# Altium PCB Receiver.PcbDoc
Units mm, origin at the board's own origin, x right, y up, seen from the top; angles counter-clockwise.
Board outline 55 x 38 mm, 4 copper layers (Component Side, Signal Layer 1, Signal Layer 2, Solder Side), stack 1.57 mm thick; 48 components, 36 nets, 141 pads, 184 vias.
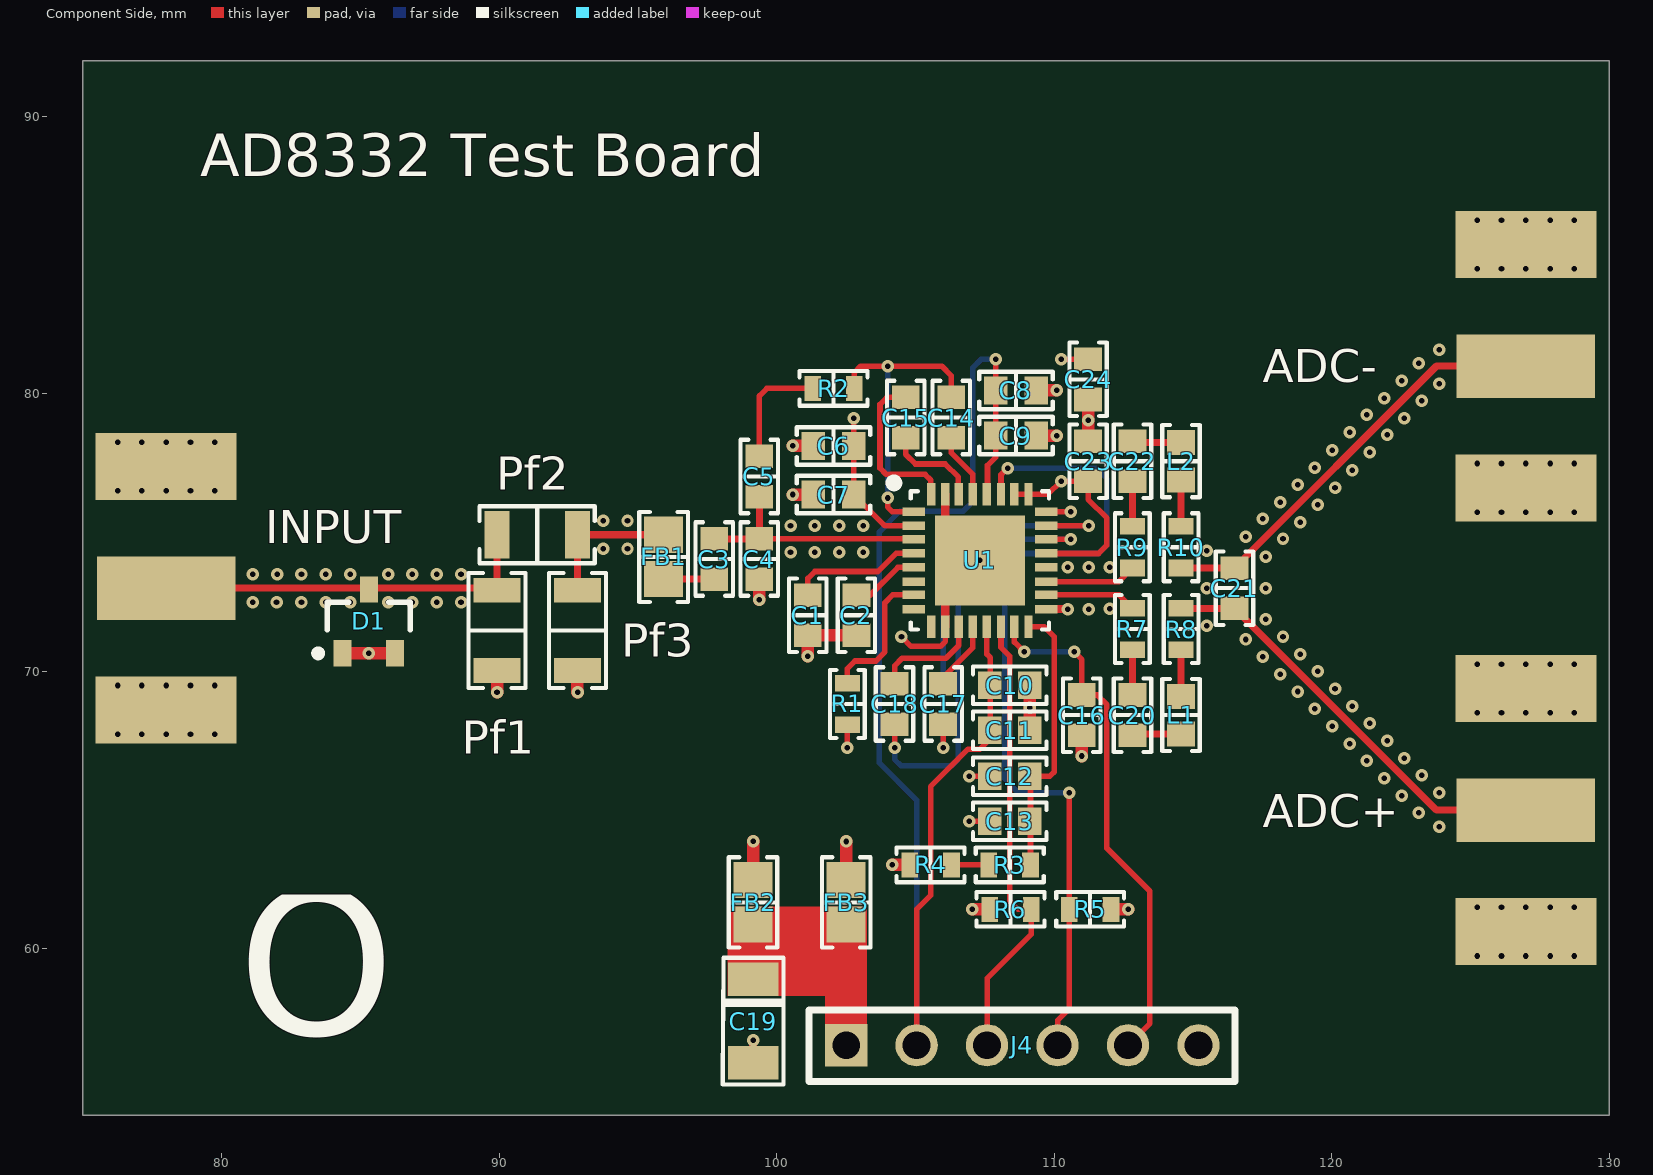
[diagram p0: Component Side view]
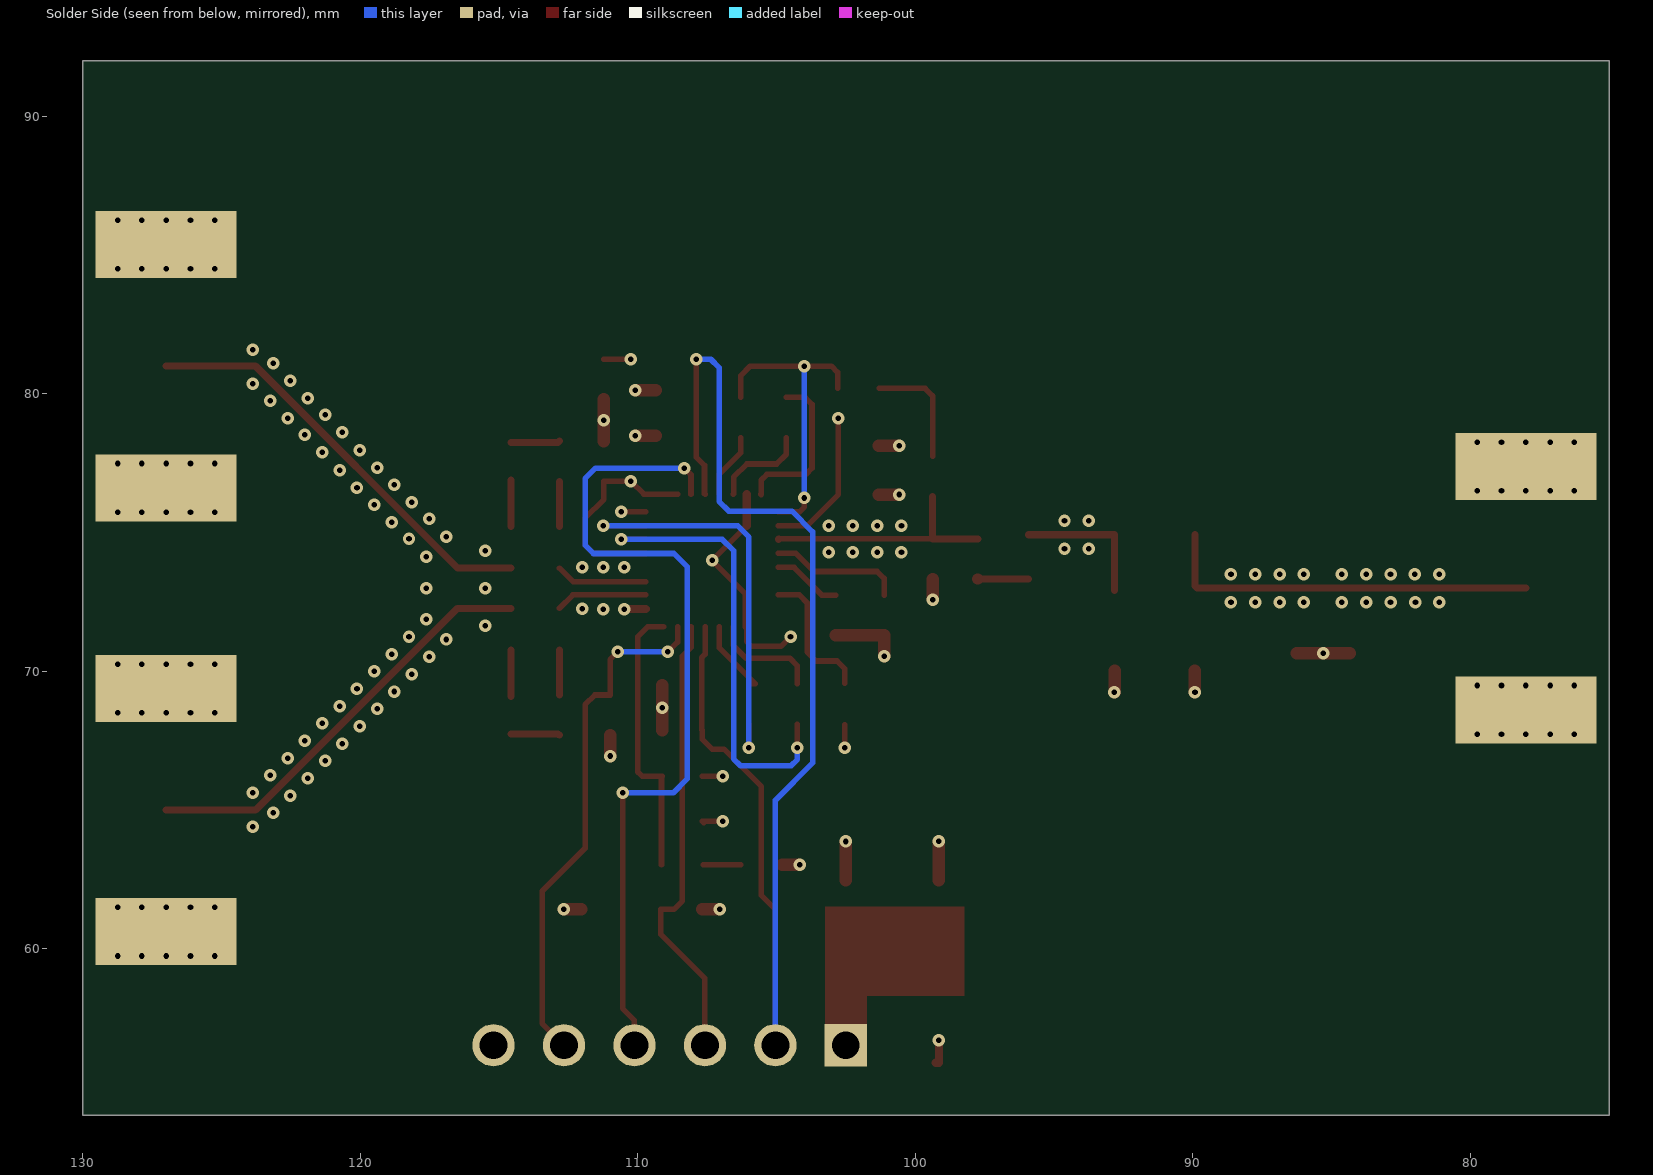
[diagram p1: Solder Side view, seen from below]
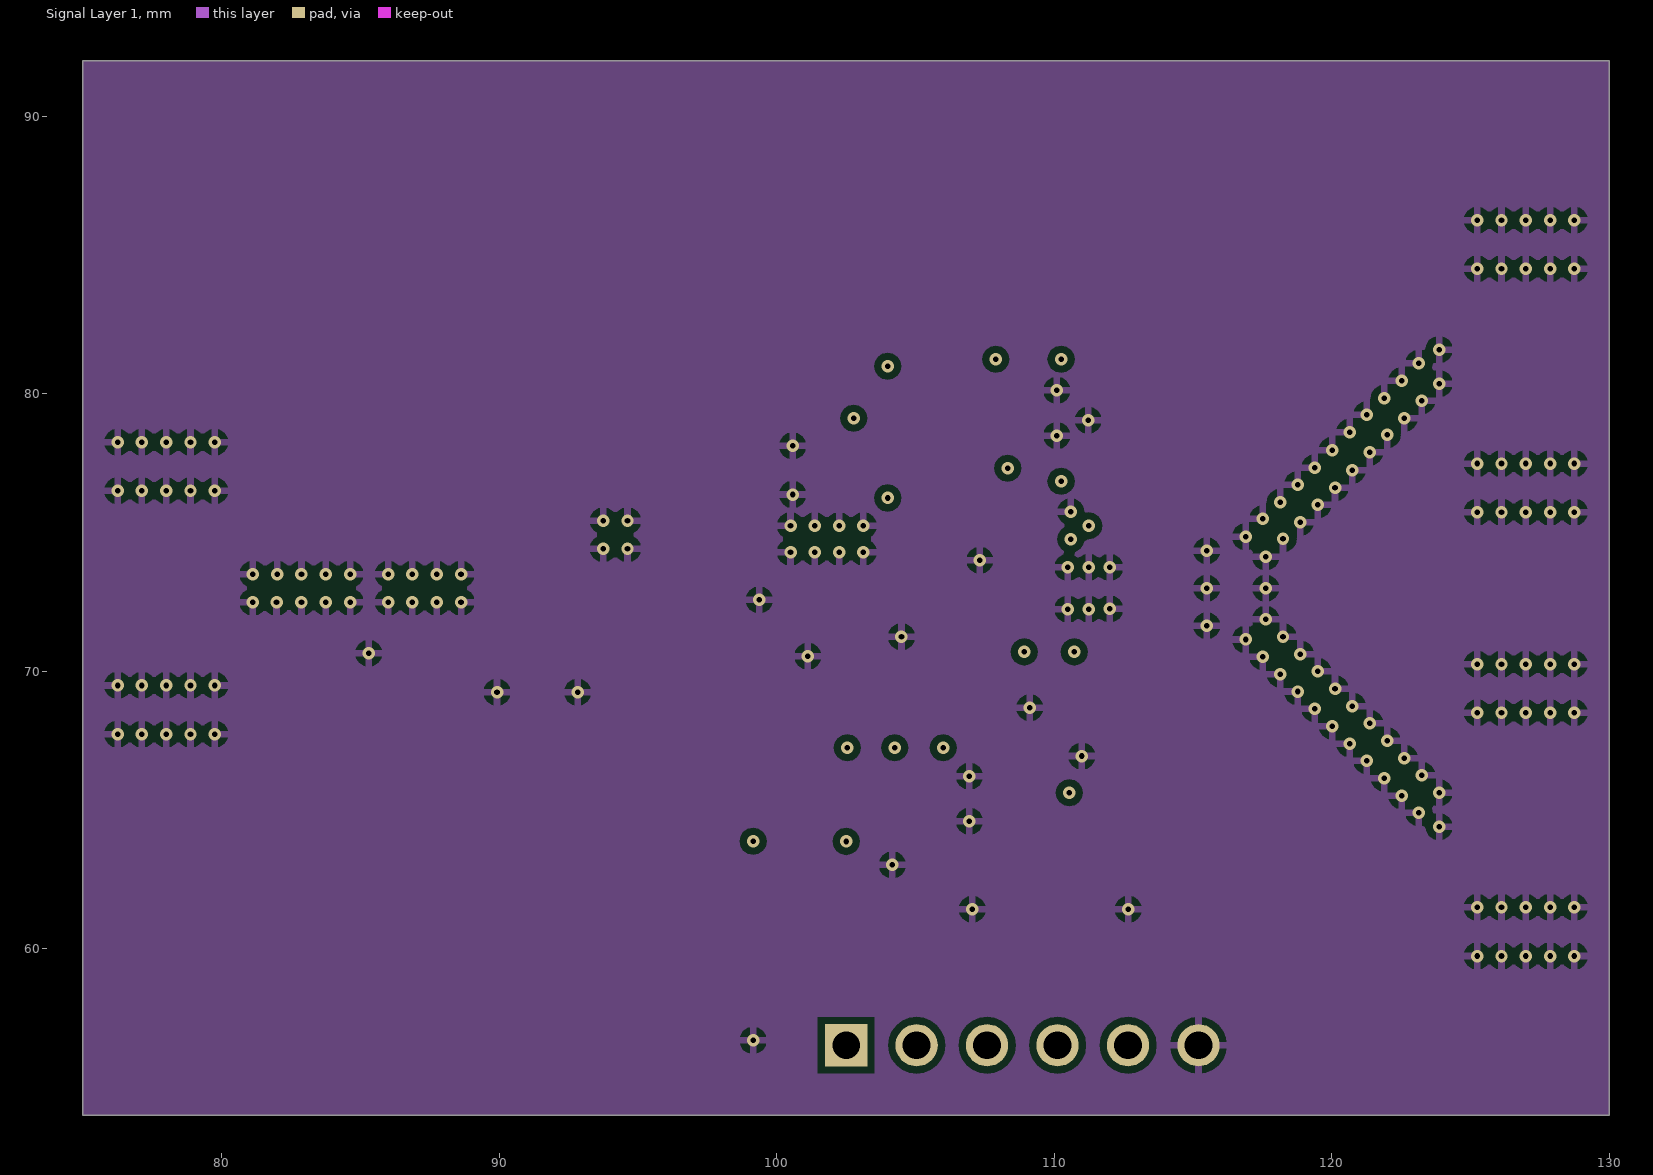
[diagram p2: Signal Layer 1]
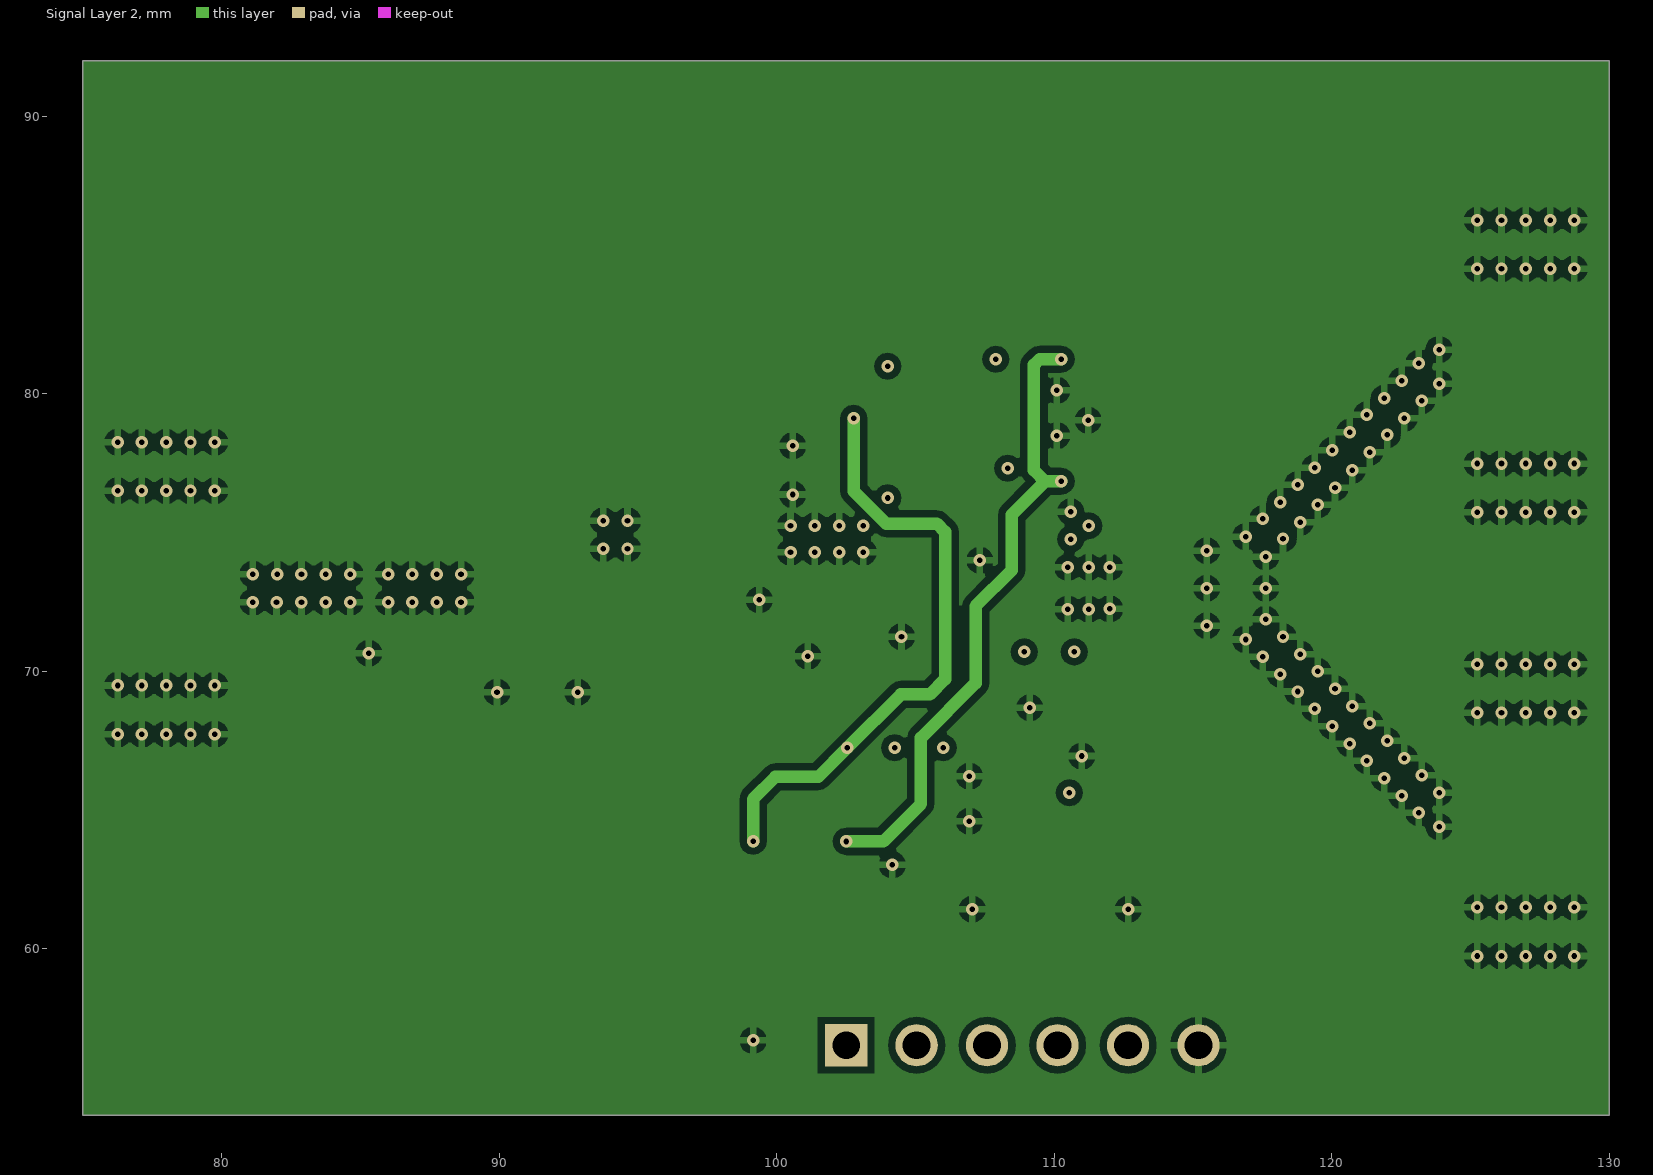
[diagram p3: Signal Layer 2]
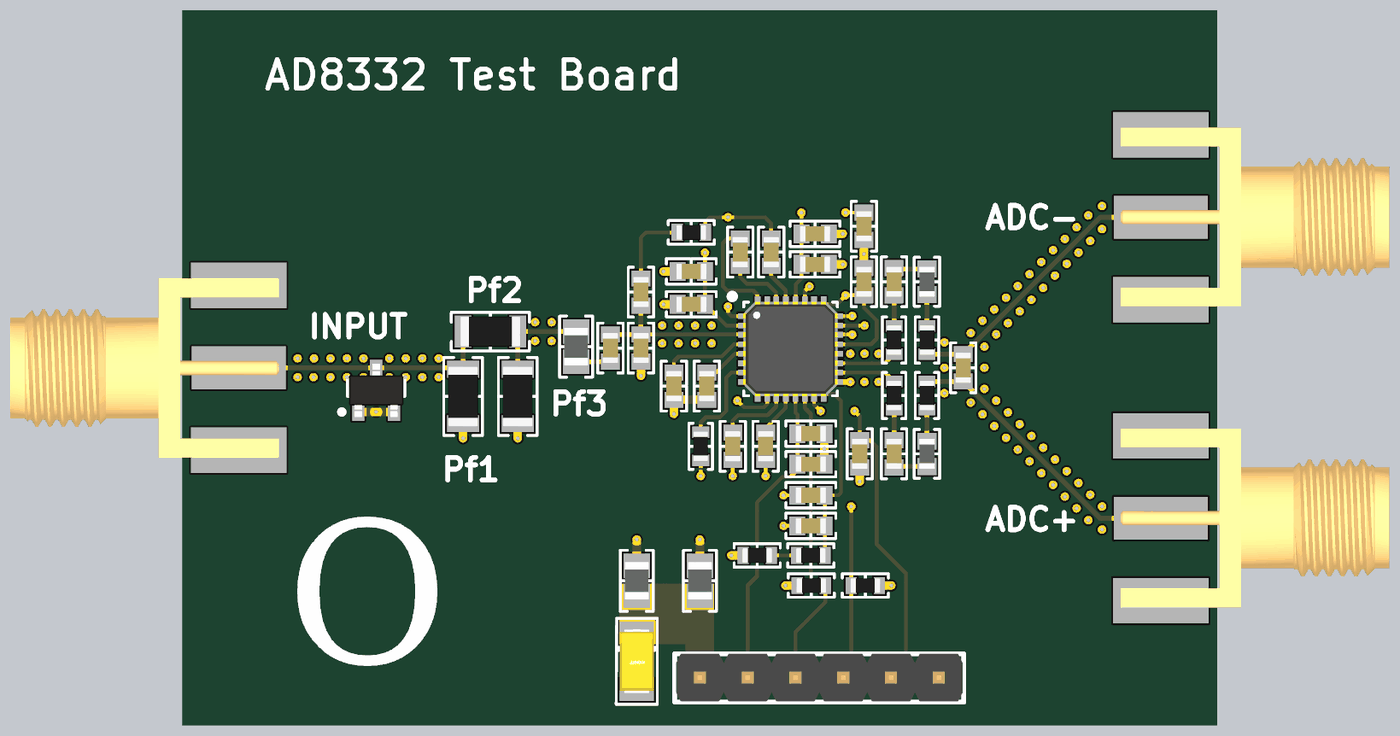
[diagram p4: 3D render of the assembled board from above, using the file's embedded part models]

## Layer stack, top to bottom
Top Solder: solder mask 0.015, Solder Resist, Dk 3.8
Component Side: signal copper 0.035
Dielectric 1: prepreg 0.2, 7628, Dk 4.6
Signal Layer 1: signal copper 0.0175
Dielectric 2: core 1.065, FR-4, Dk 4.5
Signal Layer 2: signal copper 0.0175
Dielectric 5: prepreg 0.2, 7628, Dk 4.6
Solder Side: signal copper 0.035
Bottom Solder: solder mask 0.015, Solder Resist, Dk 3.8

## Board outline
75,54 130,54 130,92 75,92

## Design rules (kind name [scope] priority, off if disabled: settings)
Clearance [All] p1 off: gap=0.254 ignorepadtopadclearanceinfootprint=FALSE except(0: Arc-Hole Track-Hole SMDPad-Hole THPad-Hole Via-Hole Fill-Hole Poly-Hole Region-Hole Text-Hole)
PolygonConnect [All] p1: connectstyle=Relief reliefconductorwidth=0.254 reliefentries=4 polygonreliefangle="90 Angle" airgapwidth=0.254
RoutingVias [All] p1: holewidth=0.711 width=1.27 viastyle="Through Hole" minholewidth=0.2 minwidth=0.45 maxholewidth=0.711 maxwidth=1.27
SolderMaskExpansion [All] p1: expansion=0.102
Width [All] p1: maxlimit=0.5 minlimit=0.2 preferedwidth=0.254
30 further rules are at their usual default settings.

## Components (designator, comment, footprint, x,y, rotation, side; value= is the part's Value field where it differs from the comment)
ADC+ "73251-1150" 73251-1150 130,65 r0 top (schematic designator J2)
ADC- "73251-1150" 73251-1150 130,81 r0 top (schematic designator J3)
C1 "100nF" "CAP 0603/1608" 101.125,72.025 r90 top
C2 "100nF" "CAP 0603/1608" 102.875,72.025 r90 top
C3 "100nF" "CAP 0603/1608" 97.75,74.05 r90 top
C4 "22pF" "CAP 0603/1608" 99.375,74.05 r90 top
C5 "18nF" "CAP 0603/1608" 99.375,77.025 r270 top
C6 "100nF" "CAP 0603/1608" 102.05,78.125 r180 top
C7 "1nF" "CAP 0603/1608" 102.05,76.375 r0 top
C8 "100nF" "CAP 0603/1608" 108.625,80.125 r0 top
C9 "1nF" "CAP 0603/1608" 108.625,78.5 r180 top
C10 "1nF" "CAP 0603/1608" 108.4,69.5 r180 top
C11 "100nF" "CAP 0603/1608" 108.4,67.875 r0 top
C12 "1nF" "CAP 0603/1608" 108.4,66.225 r0 top
C13 "100nF" "CAP 0603/1608" 108.4,64.6 r0 top
C14 "100nF" "CAP 0603/1608" 106.296,79.15 r90 top
C15 "100nF" "CAP 0603/1608" 104.65,79.15 r90 top
C16 "1nF" "CAP 0603/1608" 111,68.425 r90 top
C17 "100nF" "CAP 0603/1608" 106,68.825 r270 top
C18 "100nF" "CAP 0603/1608" 104.25,68.825 r270 top
C19 "1uF" "CAP CASE A" 99.15,57.395 r270 top
C20 "100nF" "CAP 0603/1608" 112.825,68.425 r270 top
C21 "18pF" "CAP 0603/1608" 116.5,73 r270 top
C22 "100nF" "CAP 0603/1608" 112.825,77.575 r90 top
C23 "1nF" "CAP 0603/1608" 111.225,77.575 r270 top
C24 "100nF" "CAP 0603/1608" 111.225,80.525 r90 top
D1 "BAS40-04" SOT-23-3 85.3,71.8 r90 top
FB1 "120R" "FER 0805/2012" 95.925,74.125 r270 top
FB2 "120R" "FER 0805/2012" 99.15,61.675 r90 top
FB3 "120R" "FER 0805/2012" 102.505,61.675 r90 top
INPUT "73251-1150" 73251-1150 75,73 r180 top (schematic designator J1)
J4 "2211S-06G" "HEADER 6-WAY 2.54 mm" 102.505,56.525 r0 top
L1 "1.5uH" "FER 0603/1608" 114.575,68.425 r90 top
L2 "1.5uH" "FER 0603/1608" 114.575,77.575 r270 top
Pf1 "0R" "RES 1206/3216" 89.922,71.475 r90 top
Pf2 "0R" "RES 1206/3216" 91.372,74.925 r0 top
Pf3 "0R" "RES 1206/3216" 92.822,71.475 r90 top
R1 "0R" "RES 0603/1608" 102.55,68.825 r270 top
R2 "280R" "RES 0603/1608" 102.05,80.2 r180 top
R3 "10K" "RES 0603/1608" 108.4,63.025 r180 top
R4 "1K" "RES 0603/1608" 105.55,63.025 r0 top
R5 "10K" "RES 0603/1608" 111.3,61.425 r180 top
R6 "10K" "RES 0603/1608" 108.425,61.425 r0 top
R7 "84.5R" "RES 0603/1608" 112.825,71.525 r270 top
R8 "158R" "RES 0603/1608" 114.575,71.525 r90 top
R9 "84.5R" "RES 0603/1608" 112.825,74.475 r90 top
R10 "158R" "RES 0603/1608" 114.575,74.475 r270 top
U1 "AD8332ACPZ-R7" LFCSP-32 107.325,74 r0 top

## Footprints (in the part's own frame and the unit in brackets; to place one, negate y for a bottom-side part, rotate by r counter-clockwise, add the part's x,y. Pads: shape width x height; smd on the part's side, far side on the other; paste and mask are expansions set on the pad)
73251-1150 [mm]
  rect 5x2.29 smd: 1(-3,0)
  rect 5.08x2.415 smd: 2(-3,-4.383) 2(-3,4.383)
  rect 5.08x2.415 smd far side: 2(-3,-4.383) 2(-3,4.383)
  body extent -5.14,-4.75 9.14,4.78, height 4.36
"CAP 0603/1608" [mm] "Chip Capacitor, 2-Leads, Body 1.60x0.80mm, IPC Medium Density"
  rect 0.85x1 smd: 1(-0.725,0) 2(0.725,0)
  silkscreen extent -1.33,-0.67 1.33,0.67, body extent -0.8,-0.41 0.8,0.41, height 0.82
"CAP CASE A" [mm] "Tantalum Capacitor CASE A (3216)"
  rect 1.2x1.82 smd: 1(-1.505,0) 2(1.505,0)
  silkscreen extent -2.29,-1.09 2.29,1.09, body extent -1.7,-0.9 1.7,0.9, height 1.81
"FER 0603/1608" [mm] "Chip Ferrite, 2-Leads, Body 1.60x0.80mm, IPC Medium Density"
  rect 0.9x1 smd: 1(-0.675,0) 2(0.675,0)
  silkscreen extent -1.3,-0.67 1.3,0.67, body extent -0.8,-0.41 0.8,0.41, height 0.82
"FER 0805/2012" [mm] "Chip Ferrite, 2-Leads, Body 2.00x1.20mm, IPC Medium Density"
  rect 1.3x1.4 smd: 1(-0.8,0) 2(0.8,0)
  silkscreen extent -1.63,-0.87 1.63,0.87, body extent -1,-0.64 1,0.64, height 1.26
"HEADER 6-WAY 2.54 mm" [mil]
  rect 60x60 hole 39.37: 1(0,0)
  round 60 hole 39.37: 2(100,0) 3(200,0) 4(300,0) 5(400,0) 6(500,0)
  silkscreen extent -53,-51 552,50, body extent -50,-110 550,50, height 337
LFCSP-32 [mil] "5x5mm"
  rect 32x12 smd: 1(-94,69) 2(-94,49) 3(-94,30) 4(-94,10) 5(-94,-10) 6(-94,-30) 7(-94,-49) 8(-94,-69) 17(94,-69) 18(94,-49) 19(94,-30) 20(94,-10) 21(94,10) 22(94,30) 23(94,49) 24(94,69)
  rect 12x32 smd: 9(-69,-94) 10(-49,-94) 11(-30,-94) 12(-10,-94) 13(10,-94) 14(30,-94) 15(49,-94) 16(69,-94) 25(69,94) 26(49,94) 27(30,94) 28(10,94) 29(-10,94) 30(-30,94) 31(-49,94) 32(-69,94)
  rect 128x128 smd: 33(0,0)
  silkscreen extent -126,-98 98,114, body extent -99,-99 99,99, height 35
"RES 0603/1608" [mm] "Chip Resistor, 2-Leads, Body 1,60x0,80mm, IPC Medium Density"
  rect 0.6x0.9 smd: 1(-0.75,0) 2(0.75,0)
  silkscreen extent -1.22,-0.63 1.22,0.63, body extent -0.8,-0.4 0.8,0.4, height 0.5
"RES 1206/3216" [mm] "Chip Resistor, 2-Leads, Body 3,20x1,60mm, IPC Medium Density"
  rect 0.9x1.7 smd: 1(-1.45,0) 2(1.45,0)
  silkscreen extent -2.07,-1.02 2.07,1.02, body extent -1.6,-0.8 1.6,0.8, height 0.6
SOT-23-3 [mm] "SOT23, 3-Leads, Body 2.90x2.40mm, Pitch 0.95mm, IPC Medium Density"
  rect 0.95x0.65 smd: 1(-1.15,0.95) 2(-1.15,-0.95) 3(1.15,0)
  silkscreen extent -1.27,-1.5 0.7,1.95, body extent -1.41,-1.45 1.41,1.45, height 1.5

## Part data
ADC+ ADC- INPUT: "CONN SMA RCPT STR 50OHM EDGE MNT", Case/Package=SMA, Dielectric Material=PTFE, Housing Color=Gold, Manufacturer=Molex, Max Frequency=18GHz, Max Operating Temperature=165°C, Min Operating Temperature=-65°C, Package Quantity=1600, Voltage Rating=500V, Body Material=Brass, Body Plating=Gold, ComponentLink1Description=http://www.farnell.com/datasheets/1596721.pdf?src-supplier=Farnell, ComponentLink1URL=http://www.farnell.com/datasheets/1596721.pdf?src-supplier=Farnell, ComponentLink2Description=http://www.molex.com/webdocs/datasheets/pdf/en-us/0732511150_RF_COAX_CONNECTORS.pdf?src-supplier=Avnet, ComponentLink2URL=http://www.molex.com/webdocs/datasheets/pdf/en-us/0732511150_RF_COAX_CONNECTORS.pdf?src-supplier=Avnet, ComponentLink3Description=https://www.molex.com/pdm_docs/ps/PS-89675-346.pdf?src-supplier=Digi-Key, ComponentLink3URL=https://www.molex.com/pdm_docs/ps/PS-89675-346.pdf?src-supplier=Digi-Key, ComponentLink4Description=http://www.onlinecomponents.com/productFiles/mf-MOL/473370732511150_rf_coax_nectors.pdf?src-supplier=Onlinecomponents.com, ComponentLink4URL=http://www.onlinecomponents.com/productFiles/mf-MOL/473370732511150_rf_coax_nectors.pdf?src-supplier=Onlinecomponents.com, ComponentLink5Description=http://www.farnell.com/datasheets/1596721.pdf?src-supplier=Element14, ComponentLink5URL=http://www.farnell.com/datasheets/1596721.pdf?src-supplier=Element14, ComponentLink6Description=http://uk.rs-online.com/webdocs/13c4/0900766b813c49cf.pdf?src-supplier=RSComponents, ComponentLink6URL=http://uk.rs-online.com/webdocs/13c4/0900766b813c49cf.pdf?src-supplier=RSComponents, Connector Type=SMA,Socket, Contact Material=Copper, Contact Plating=Gold, Depth=9.53mm, Fastening Type=Threaded, Impedance=50R, Insulation Material=Polytetrafluoroethylene, Lead Free="Lead Free", Length=9.53mm, Manufacturer Part Number=73251-1150, Mount=Edge, Packaging=Tray, Radiation Hardening=No, Stock 1=0, Supplier 1=Farnell, Termination=Solder
C1 C2 C3 C6 C8 C11 C13 C14 C15 C17 C18 C20 C22 C24: library part GCJ188R71H104KA12D, "CAPACITOR 0603 100nF 10% 50V", Case/Package=0603, Case Code (Metric)=1608, Dielectric=X7R, Manufacturer=Murata, Max Operating Temperature=125°C, Min Operating Temperature=-55°C, Package Quantity=1, Ratings=AEC-Q200, Tolerance=10%, Voltage Rating=50V, Capacitance=100nF, Case Code (Imperial)=0603, ComponentLink1Description=http://search.murata.co.jp/Ceramy/image/img/A01X/partnumbering_e_02.pdf?src-supplier=Digi-Key, ComponentLink1URL=http://search.murata.co.jp/Ceramy/image/img/A01X/partnumbering_e_02.pdf?src-supplier=Digi-Key, ComponentLink2Description=http://www.murata.com/products/catalog/pdf/c03e.pdf?src-supplier=Future+Electronics, ComponentLink2URL=http://www.murata.com/products/catalog/pdf/c03e.pdf?src-supplier=Future+Electronics, ComponentLink3Description=https://www.verical.com/server-webapp/html/getDatasheet?partID=369886&src-supplier=Verical, ComponentLink3URL=https://www.verical.com/server-webapp/html/getDatasheet?partID=369886&src-supplier=Verical, Depth=0.8mm, Features="Soft Termination", Height=0.8mm, Lead Free="Lead Free", Length=1.6mm, Manufacturer Part Number=GCJ188R71H104KA12D, Mount="Surface Mount", Packaging="Tape and Reel", Pricing 1="150=0.11, 500=0.066, 1000=0.055 (EUR)", Radiation Hardening=No, Stock 1=0, Supplier 1=Farnell, Termination=SMD/SMT, Thickness=0.035inch, Voltage Rating (DC)=50V, Width=0.031inch
C4: library part C1608C0G1H220J080AA, "CAPACITOR 0603 22 pF 50 V  5%, C0G / NP0", Case/Package=0603, Case Code (Metric)=1608, Dielectric=C0G, Dielectric Material=Ceramic, Manufacturer=TDK, Max Operating Temperature=125°C, Min Operating Temperature=-55°C, Package Quantity=1, Temperature Coefficient=30ppm/°C, Tolerance=5%, Voltage=50V, Capacitance=22pF, Case Code (Imperial)=0603, ComponentLink1Description=https://product.tdk.com/info/en/documents/chara_sheet/C1608C0G1H220J080AA.pdf?src-supplier=Digi-Key, ComponentLink1URL=https://product.tdk.com/info/en/documents/chara_sheet/C1608C0G1H220J080AA.pdf?src-supplier=Digi-Key, ComponentLink2Description=http://www.tdk.co.jp/tefe02/e412_c.pdf?src-supplier=Avnet+Europe, ComponentLink2URL=http://www.tdk.co.jp/tefe02/e412_c.pdf?src-supplier=Avnet+Europe, ComponentLink3Description=http://www.farnell.com/datasheets/1796654.pdf?src-supplier=Element14, ComponentLink3URL=http://www.farnell.com/datasheets/1796654.pdf?src-supplier=Element14, ComponentLink4Description=http://www.farnell.com/datasheets/1744655.pdf?src-supplier=Element14, ComponentLink4URL=http://www.farnell.com/datasheets/1744655.pdf?src-supplier=Element14, ComponentLink5Description=http://www.farnell.com/datasheets/1913358.pdf?src-supplier=Element14, ComponentLink5URL=http://www.farnell.com/datasheets/1913358.pdf?src-supplier=Element14, ComponentLink6Description=http://www.farnell.com/datasheets/2291921.pdf?src-supplier=Verical, ComponentLink6URL=http://www.farnell.com/datasheets/2291921.pdf?src-supplier=Verical, Depth=0.8mm, Height=0.8mm, Lead Free="Lead Free", Length=1.6mm, Manufacturer Part Number=C1608C0G1H220J080AA, Mount="Surface Mount", Number of Pins=2, Packaging="Tape and Reel", Radiation Hardening=No, REACH SVHC=Unknown, Stock 1=0, Supplier 1=Farnell, Termination=SMD/SMT, Thickness=0.037inch, Voltage Rating=50V, Voltage Rating (DC)=50V, Weight=7.1E-05oz, Width=0.031inch
C5: library part C1608C0G1V183J080AC, "CAPACITOR 0603 18nF 35V NP0", Case/Package=0603, Case Code (Metric)=1608, Dielectric Material=Ceramic, Manufacturer=TDK, Max Operating Temperature=125°C, Min Operating Temperature=-55°C, Tolerance=5%, Voltage Rating=35V, Capacitance=18nF, Case Code (Imperial)=0603, ComponentLink1Description=https://product.tdk.com/info/en/catalog/spec/mlccspec_commercial_general_midvoltage_en.pdf?src-supplier=Digi-Key, ComponentLink1URL=https://product.tdk.com/info/en/catalog/spec/mlccspec_commercial_general_midvoltage_en.pdf?src-supplier=Digi-Key, Lead Free="Lead Free", Length=0.063inch, Manufacturer Part Number=C1608C0G1V183J080AC, Mount="Surface Mount", Packaging="Tape and Reel", Pricing 1="150=0.127, 500=0.0919, 1000=0.0807, 2000=0.0669, 4000=0.0576, 20000=0.0502 (EUR)", Stock 1=0, Supplier 1=Farnell, Thickness=0.035inch, Voltage Rating (DC)=35V, Width=0.031inch
C7 C9 C10 C12 C16 C23: library part GRM1885C2A102JA01D, "CAPACITOR 0603 1nF 100V C0G/NP0", Case/Package=0603, Case Code (Metric)=1608, Dielectric=C0G, Manufacturer=Murata, Max Operating Temperature=125°C, Min Operating Temperature=-55°C, Package Quantity=1, Temperature Coefficient=30ppm/°C, Tolerance=5%, Voltage=100V, Capacitance=1nF, Case Code (Imperial)=0603, ComponentLink1Description=http://psearch.murata.com/capacitor/product/GRM1885C2A102JA01%23.pdf?src-supplier=Future+Electronics, ComponentLink1URL=http://psearch.murata.com/capacitor/product/GRM1885C2A102JA01%23.pdf?src-supplier=Future+Electronics, ComponentLink2Description=http://components.arrow.com/part/dataview/41890575S7256258N2606?src-supplier=Arrow+Electronics, ComponentLink2URL=http://components.arrow.com/part/dataview/41890575S7256258N2606?src-supplier=Arrow+Electronics, ComponentLink3Description=http://www.mouser.com/ds/2/281/c02e-2905.pdf?src-supplier=Mouser, ComponentLink3URL=http://www.mouser.com/ds/2/281/c02e-2905.pdf?src-supplier=Mouser, ComponentLink4Description=https://www.murata.com/~/media/webrenewal/support/library/catalog/products/capacitor/mlcc/c02e.ashx?la=en-us&src-supplier=Digi-Key, ComponentLink4URL=https://www.murata.com/~/media/webrenewal/support/library/catalog/products/capacitor/mlcc/c02e.ashx?la=en-us&src-supplier=Digi-Key, ComponentLink5Description=https://produktinfo.conrad.com/datenblaetter/450000-474999/451233-da-01-en-VS_KONDENSATOR_0603.pdf?src-supplier=Conrad, ComponentLink5URL=https://produktinfo.conrad.com/datenblaetter/450000-474999/451233-da-01-en-VS_KONDENSATOR_0603.pdf?src-supplier=Conrad, Depth=0.8mm, Height=0.8mm, Lead Free="Lead Free", Length=1.6mm, Manufacturer Part Number=GRM1885C2A102JA01D, Material=Ceramic, Mount="Surface Mount", Packaging="Tape and Reel", Pricing 1="4000=0.0144, 20000=0.0141 (EUR)", Radiation Hardening=No, REACH SVHC="No SVHC", Stock 1=0, Supplier 1=Farnell, Termination=SMD/SMT, Thickness=0.035inch, Voltage Rating=100V, Voltage Rating (DC)=100V, Width=0.031inch
C19: library part T491A105K016AT, "CAPACITOR TANT 1uF 16V", Case/Package=1206, Case Code (Metric)=3216, Dielectric Material=Tantalum, ESR (Equivalent Series Resistance)=10R, Leakage Current=500nA, Manufacturer=KEMET, Max Operating Temperature=125°C, Min Operating Temperature=-55°C, Package Quantity=1, Ripple Current=87mA, Tolerance=20%, Voltage=16V, Capacitance=1uF, Case Code (Imperial)=1206, ComponentLink1Description=https://4donline.ihs.com/images/VipMasterIC/IC/KEME/KEME-S-A0006487387/KEME-S-A0006487387-1.pdf?hkey=52A5661711E402568146F3353EA87419&src-supplier=Element14, ComponentLink1URL=https://4donline.ihs.com/images/VipMasterIC/IC/KEME/KEME-S-A0006487387/KEME-S-A0006487387-1.pdf?hkey=52A5661711E402568146F3353EA87419&src-supplier=Element14, ComponentLink2Description=http://www.rapidonline.com/pdf/458280_da_en_01.pdf?src-supplier=Rapid+Electronics, ComponentLink2URL=http://www.rapidonline.com/pdf/458280_da_en_01.pdf?src-supplier=Rapid+Electronics, ComponentLink3Description=http://www.jameco.com/Jameco/Products/ProdDS/1573169.pdf?src-supplier=Jameco, ComponentLink3URL=http://www.jameco.com/Jameco/Products/ProdDS/1573169.pdf?src-supplier=Jameco, ComponentLink4Description=http://www.kemet.com/kemet/web/homepage/kechome.nsf/file/T491%20Series/$file/KEM_T2005_T491.pdf?src-supplier=Farnell, ComponentLink4URL=http://www.kemet.com/kemet/web/homepage/kechome.nsf/file/T491%20Series/$file/KEM_T2005_T491.pdf?src-supplier=Farnell, ComponentLink5Description=http://www.mouser.com/ds/2/212/KEM_T2005_T491-1093550.pdf?src-supplier=Mouser, ComponentLink5URL=http://www.mouser.com/ds/2/212/KEM_T2005_T491-1093550.pdf?src-supplier=Mouser, ComponentLink6Description=https://www.distrelec.biz/Web/Downloads/_t/ds/KEM_T2005_T491_eng_tds.pdf?mime=application%2Fpdf&src-supplier=Distrelec, ComponentLink6URL=https://www.distrelec.biz/Web/Downloads/_t/ds/KEM_T2005_T491_eng_tds.pdf?mime=application%2Fpdf&src-supplier=Distrelec, ComponentLink7Description=https://api.kemet.com/component-edge/download/datasheet/T491A105K016AT.pdf?src-supplier=Digi-Key, ComponentLink7URL=https://api.kemet.com/component-edge/download/datasheet/T491A105K016AT.pdf?src-supplier=Digi-Key, ComponentLink8Description=http://www.kemet.com/kemet/web/homepage/kechome.nsf/file/T491%20Series/$file/KEM_T2005_T491.pdf?src-supplier=Element14, ComponentLink8URL=http://www.kemet.com/kemet/web/homepage/kechome.nsf/file/T491%20Series/$file/KEM_T2005_T491.pdf?src-supplier=Element14, ComponentLink9Description=http://uk.rs-online.com/webdocs/1529/0900766b815290c9.pdf?src-supplier=RSComponents, ComponentLink9URL=http://uk.rs-online.com/webdocs/1529/0900766b815290c9.pdf?src-supplier=RSComponents, ComponentLink10Description=https://www.alliedelec.com/m/d/1172a60f7bb3eb66344f86e8fb9ddbde.pdf?src-supplier=Allied+Electronics, ComponentLink10URL=https://www.alliedelec.com/m/d/1172a60f7bb3eb66344f86e8fb9ddbde.pdf?src-supplier=Allied+Electronics, Depth=1.6mm, Dissipation Factor=4%, Features="General Purpose", Height=1.6mm, Height - Seated (Max)=0.071inch, Lead Free="Lead Free", Length=3.2mm, Life (Hours)=2000Hour, Manufacturer Part Number=T491A105K016AT, Mount="Surface Mount,PCB", Number of Pins=2, Packaging="Tape and Reel", Polarity=Polar, REACH SVHC="No SVHC", Stock 1=0, Supplier 1=Farnell, Termination=SMD/SMT, Voltage Rating=16V, Voltage Rating (DC)=16V, Width=1.6mm
C21: library part C1608C0G1H180J080AA, "CAPACITOR 0603 18pF 50V C0G", Case/Package=0603, Case Code (Metric)=1608, Dielectric=C0G, Dielectric Material=Ceramic, Manufacturer=TDK, Max Operating Temperature=125°C, Min Operating Temperature=-55°C, Package Quantity=1, Temperature Coefficient=30ppm/°C, Tolerance=5%, Voltage=50V, Capacitance=18pF, Case Code (Imperial)=0603, ComponentLink1Description=http://www.farnell.com/datasheets/1796654.pdf?src-supplier=Element14, ComponentLink1URL=http://www.farnell.com/datasheets/1796654.pdf?src-supplier=Element14, ComponentLink2Description=http://www.farnell.com/datasheets/1571323.pdf?src-supplier=Element14, ComponentLink2URL=http://www.farnell.com/datasheets/1571323.pdf?src-supplier=Element14, ComponentLink3Description=http://www.farnell.com/datasheets/1571323.pdf?src-supplier=Farnell, ComponentLink3URL=http://www.farnell.com/datasheets/1571323.pdf?src-supplier=Farnell, ComponentLink4Description=http://www.farnell.com/datasheets/1744655.pdf?src-supplier=Element14, ComponentLink4URL=http://www.farnell.com/datasheets/1744655.pdf?src-supplier=Element14, ComponentLink5Description=https://product.tdk.com/info/en/documents/chara_sheet/C1608C0G1H180J080AA.pdf?src-supplier=Digi-Key, ComponentLink5URL=https://product.tdk.com/info/en/documents/chara_sheet/C1608C0G1H180J080AA.pdf?src-supplier=Digi-Key, ComponentLink6Description=http://www.tdk.co.jp/tefe02/e412_c.pdf?src-supplier=Avnet+Europe, ComponentLink6URL=http://www.tdk.co.jp/tefe02/e412_c.pdf?src-supplier=Avnet+Europe, Depth=0.8mm, Height=0.8mm, Lead Free="Lead Free", Length=1.6mm, Manufacturer Part Number=C1608C0G1H180J080AA, Mount="Surface Mount", Number of Pins=2, Packaging="Tape and Reel", Radiation Hardening=No, REACH SVHC="No SVHC", Stock 1=0, Supplier 1=Farnell, Termination=SMD/SMT, Thickness=0.037inch, Voltage Rating=50V, Voltage Rating (DC)=50V, Weight=7.1E-05oz, Width=0.031inch
D1: "SCHOTTKY DIODE", Case/Package=SOT, Forward Current=120mA, Forward Voltage=380mV, Manufacturer=Infineon, Max Forward Surge Current (Ifsm)=200mA, Max Operating Temperature=125°C, Max Repetitive Reverse Voltage (Vrrm)=40V, Min Operating Temperature=-55°C, ComponentLink1Description=https://www.distrelec.biz/Web/Downloads/ta/_e/srBAS40_data_e.pdf?mime=application%2Fpdf&src-supplier=Distrelec, ComponentLink1URL=https://www.distrelec.biz/Web/Downloads/ta/_e/srBAS40_data_e.pdf?mime=application%2Fpdf&src-supplier=Distrelec, Element Configuration=Dual, Manufacturer Part Number=BAS40-04, Number of Pins=3, Packaging="Tape and Reel", REACH SVHC="No SVHC", Stock 1=0, Supplier 1=Farnell, Termination=SMD/SMT
FB1 FB2 FB3: library part BLM21PG121SN1D, "FERRITE BEAD 120Ohm 3A", Case/Package=0805, Case Code (Metric)=2012, Current Rating=3A, DC Resistance (DCR)=30mR, Manufacturer=Murata, Max Operating Temperature=125°C, Min Operating Temperature=-55°C, Package Quantity=1, Test Frequency=100MHz, Tolerance=25%, Case Code (Imperial)=0805, ComponentLink1Description=http://search.murata.co.jp/Ceramy/image/img/PDF/ENG/L0110S0100BLM21P.pdf?src-supplier=Future+Electronics, ComponentLink1URL=http://search.murata.co.jp/Ceramy/image/img/PDF/ENG/L0110S0100BLM21P.pdf?src-supplier=Future+Electronics, ComponentLink2Description=https://www.murata.com/en-us/products/productdata/8796738977822/ENFA0005.pdf?src-supplier=Digi-Key, ComponentLink2URL=https://www.murata.com/en-us/products/productdata/8796738977822/ENFA0005.pdf?src-supplier=Digi-Key, ComponentLink3Description=http://www.farnell.com/datasheets/1756152.pdf?src-supplier=Element14, ComponentLink3URL=http://www.farnell.com/datasheets/1756152.pdf?src-supplier=Element14, Depth=1.25mm, Height=0.85mm, Impedance=120R, Lead Free="Lead Free", Length=2mm, Manufacturer Part Number=BLM21PG121SN1D, Material=Steel,Ferrite, Max Current Rating=3A, Max DC Current=3A, Number of Circuits=1, Number of Lines=1, Number of Pins=2, Packaging="Tape and Reel", REACH SVHC="No SVHC", Stock 1=0, Supplier 1=Farnell, Termination=SMD/SMT, Width=1.25mm
J4: "HEADER 6-Way 2.54mm TH", Flammability Rating="UL94 V-0", Insulation Resistance=1GR, Manufacturer=Multicomp, ComponentLink1Description=http://www.farnell.com/datasheets/1518407.pdf?src-supplier=Element14, ComponentLink1URL=http://www.farnell.com/datasheets/1518407.pdf?src-supplier=Element14, Contact Material="Copper Alloy", Contact Plating=Gold, Gender=Male, Height=0.47inch, Length=0.59inch, Manufacturer Part Number=2211S-06G, Mount="Through Hole", Number of Contacts=6, Number of Rows=1, Pricing 1="50=0.0344, 500=0.0253, 1500=0.0218, 2500=0.0179 (EUR)", REACH SVHC="No SVHC", Stock 1=35965, Supplier 1=Farnell, Termination="Through Hole", Weight=0.11lb, Width=0.12inch
L1 L2: library part MLF1608A1R5K, "INDUCTOR 0603 1.5uH 10%", Case/Package=0603, Case Code (Metric)=1608, Current Rating=50mA, DC Resistance (DCR)=700mR, Inductance Tolerance=10%, Manufacturer=TDK, Max Operating Temperature=85°C, Min Operating Temperature=-40°C, Package Quantity=4000, Self Resonant Frequency=100MHz, Test Frequency=10MHz, Case Code (Imperial)=0603, ComponentLink1Description=http://www.farnell.com/datasheets/321058.pdf?src-supplier=Element14, ComponentLink1URL=http://www.farnell.com/datasheets/321058.pdf?src-supplier=Element14, Core Material=Ferrite, DC Current=50mA, Depth=0.95mm, Height=0.8mm, Inductance=1.5uH, Lead Free="Lead Free", Length=0.063inch, Manufacturer Part Number=MLF1608A1R5K, Max DC Current=50mA, Military Standard=Not, Mount="Surface Mount", Number of Pins=2, Packaging="Tape and Reel", Pricing 1="150=0.141, 500=0.0877, 1000=0.0765, 2000=0.075, 4000=0.0735, 20000=0.072 (EUR)", Q Factor=35, REACH SVHC="No SVHC", Shielding=Shielded, Stock 1=0, Supplier 1=Farnell, Termination=SMD/SMT, Tolerance=10%, Weight=0.000141oz, Width=0.8mm
Pf1 Pf2 Pf3: library part ERJ8GEY0R00V, "RESISTOR 1206 0R", Case/Package=1206, Case Code (Metric)=3216, Manufacturer=Panasonic, Max Operating Temperature=155°C, Max Power Dissipation=250mW, Min Operating Temperature=-55°C, Package Quantity=5000, Resistor Type="Thick Film", Temperature Coefficient=600ppm/°C, Tolerance=0.05%, Voltage Rating=200V, Case Code (Imperial)=1206, ComponentLink1Description=http://industrial.panasonic.com/cdbs/www-data/pdf/RDA0000/AOA0000C301.pdf?src-supplier=Element14, ComponentLink1URL=http://industrial.panasonic.com/cdbs/www-data/pdf/RDA0000/AOA0000C301.pdf?src-supplier=Element14, ComponentLink2Description=http://www.farnell.com/datasheets/1678796.pdf?src-supplier=Element14, ComponentLink2URL=http://www.farnell.com/datasheets/1678796.pdf?src-supplier=Element14, ComponentLink3Description=http://www.jameco.com/Jameco/Products/ProdDS/1990261.pdf?src-supplier=Jameco, ComponentLink3URL=http://www.jameco.com/Jameco/Products/ProdDS/1990261.pdf?src-supplier=Jameco, ComponentLink4Description=http://industrial.panasonic.com/www-data/pdf/AOA0000/AOA0000CE1.pdf?src-supplier=Future+Electronics, ComponentLink4URL=http://industrial.panasonic.com/www-data/pdf/AOA0000/AOA0000CE1.pdf?src-supplier=Future+Electronics, Contact Plating=Tin, Depth=1.6mm, Features="Automotive AEC-Q200", Height=0.028inch, Lead Free="Lead Free", Length=3.2mm, Manufacturer Part Number=ERJ8GEY0R00V, Military Standard=Not, Mount="Surface Mount", Number of Terminations=2, Packaging="Tape and Reel", Power Rating=250mW, Radiation Hardening=No, REACH SVHC="No SVHC", Resistance=0R, Stock 1=0, Supplier 1=Farnell, Termination=SMD/SMT, Voltage Rating (DC)=200V, Width=0.063inch
R1: library part ERJ3GEY0R00V, "RESISTOR 0603 0R", Case/Package=0603, Case Code (Metric)=1608, Manufacturer=Panasonic, Manufacturer Part Number=ERJ-3GEY0R00V, Max Operating Temperature=155°C, Max Power Dissipation=100mW, Min Operating Temperature=-55°C, Package Quantity=1, Resistor Type="Thick Film", Temperature Coefficient=600ppm/°C, Tolerance=0%, Voltage Rating=75V, Voltage Rating (DC)=50V, Case Code (Imperial)=0603, ComponentLink1Description=http://industrial.panasonic.com/www-data/pdf/AOA0000/AOA0000CE1.pdf?src-supplier=Avnet, ComponentLink1URL=http://industrial.panasonic.com/www-data/pdf/AOA0000/AOA0000CE1.pdf?src-supplier=Avnet, ComponentLink2Description=http://industrial.panasonic.com/cdbs/www-data/pdf/RDA0000/AOA0000C301.pdf?src-supplier=Farnell, ComponentLink2URL=http://industrial.panasonic.com/cdbs/www-data/pdf/RDA0000/AOA0000C301.pdf?src-supplier=Farnell, ComponentLink3Description=http://www.jameco.com/Jameco/Products/ProdDS/1935748.pdf?src-supplier=Jameco, ComponentLink3URL=http://www.jameco.com/Jameco/Products/ProdDS/1935748.pdf?src-supplier=Jameco, ComponentLink4Description=http://www.farnell.com/datasheets/1678796.pdf?src-supplier=Element14, ComponentLink4URL=http://www.farnell.com/datasheets/1678796.pdf?src-supplier=Element14, ComponentLink5Description=http://industrial.panasonic.com/www-data/pdf/AOA0000/AOA0000CE1.pdf?src-supplier=Future+Electronics, ComponentLink5URL=http://industrial.panasonic.com/www-data/pdf/AOA0000/AOA0000CE1.pdf?src-supplier=Future+Electronics, ComponentLink6Description=http://industrial.panasonic.com/www-data/pdf/AOA0000/AOA0000CE1.pdf?src-supplier=Avnet+Europe, ComponentLink6URL=http://industrial.panasonic.com/www-data/pdf/AOA0000/AOA0000CE1.pdf?src-supplier=Avnet+Europe, ComponentLink7Description=http://www.alliedelec.com/m/d/51cd0790071e1666bdb9d00c57fcf960.pdf?src-supplier=Allied+Electronics, ComponentLink7URL=http://www.alliedelec.com/m/d/51cd0790071e1666bdb9d00c57fcf960.pdf?src-supplier=Allied+Electronics, Contact Plating=Tin, Depth=0.8mm, Features="Automotive AEC-Q200", Height=0.45mm, Lead Free="Lead Free", Length=1.6mm, Military Standard=Not, Mount="Surface Mount", Number of Terminations=2, Packaging="Tape and Reel", Power Rating=100mW, Radiation Hardening=No, REACH SVHC="No SVHC", Resistance=0R, Stock 1=0, Supplier 1=Farnell, Termination=SMD/SMT, Width=0.031inch
R2: library part ERJ3EKF2800V, "RESISTOR 0603 280R 1%", Case/Package=0603, Case Code (Metric)=1608, Manufacturer=Panasonic, Manufacturer Part Number=ERJ-3EKF2800V, Max Operating Temperature=155°C, Max Power Dissipation=100mW, Min Operating Temperature=-55°C, Package Quantity=1, Resistor Type="Thick Film", Temperature Coefficient=100ppm/°C, Tolerance=1%, Voltage Rating=75V, Voltage Rating (DC)=50V, Case Code (Imperial)=0603, ComponentLink1Description=http://www.mouser.com/ds/2/315/AOA0000C304-1149620.pdf?src-supplier=Mouser, ComponentLink1URL=http://www.mouser.com/ds/2/315/AOA0000C304-1149620.pdf?src-supplier=Mouser, ComponentLink2Description=http://www.farnell.com/datasheets/1911175.pdf?src-supplier=Farnell, ComponentLink2URL=http://www.farnell.com/datasheets/1911175.pdf?src-supplier=Farnell, ComponentLink3Description=http://industrial.panasonic.com/www-data/pdf/AOA0000/AOA0000CE2.pdf?src-supplier=Avnet, ComponentLink3URL=http://industrial.panasonic.com/www-data/pdf/AOA0000/AOA0000CE2.pdf?src-supplier=Avnet, ComponentLink4Description=https://www.alliedelec.com/m/d/623f45ff1957d936ff56d46fd1c28cac.pdf?src-supplier=Allied+Electronics, ComponentLink4URL=https://www.alliedelec.com/m/d/623f45ff1957d936ff56d46fd1c28cac.pdf?src-supplier=Allied+Electronics, ComponentLink5Description=http://www.farnell.com/datasheets/1678782.pdf?src-supplier=Element14, ComponentLink5URL=http://www.farnell.com/datasheets/1678782.pdf?src-supplier=Element14, ComponentLink6Description=http://www.farnell.com/datasheets/1911175.pdf?src-supplier=Element14, ComponentLink6URL=http://www.farnell.com/datasheets/1911175.pdf?src-supplier=Element14, Contact Plating=Tin, Depth=0.8mm, Features="Automotive AEC-Q200", Height=0.45mm, Lead Free="Lead Free", Length=1.6mm, Military Standard=Not, Mount="Surface Mount", Number of Terminations=2, Packaging="Cut Tape", Power Rating=100mW, Radiation Hardening=No, REACH SVHC="No SVHC", Resistance=280R, Stock 1=0, Supplier 1=Farnell, Termination=SMD/SMT, Weight=7.1E-05oz, Width=0.031inch
R3 R5 R6: library part ERJ3EKF1002V, "RESISTOR 0603 10K 1%", Case/Package=0603, Case Code (Metric)=1608, Manufacturer=Panasonic, Max Operating Temperature=155°C, Max Power Dissipation=100mW, Min Operating Temperature=-55°C, Package Quantity=1, Temperature Coefficient=100ppm/°C, Tolerance=1%, Voltage Rating=75V, Case Code (Imperial)=0603, ComponentLink1Description=https://industrial.panasonic.com/cdbs/www-data/pdf/RDA0000/DMA0000COL11.pdf?src-supplier=Avnet+Asia, ComponentLink1URL=https://industrial.panasonic.com/cdbs/www-data/pdf/RDA0000/DMA0000COL11.pdf?src-supplier=Avnet+Asia, ComponentLink2Description=http://www.farnell.com/datasheets/1911175.pdf?src-supplier=Element14, ComponentLink2URL=http://www.farnell.com/datasheets/1911175.pdf?src-supplier=Element14, ComponentLink3Description=https://industrial.panasonic.com/cdbs/www-data/pdf/RDA0000/DMA0000COL11.pdf?src-supplier=Avnet, ComponentLink3URL=https://industrial.panasonic.com/cdbs/www-data/pdf/RDA0000/DMA0000COL11.pdf?src-supplier=Avnet, ComponentLink4Description=http://industrial.panasonic.com/www-data/pdf/AOA0000/AOA0000CE2.pdf?src-supplier=Avnet+Europe, ComponentLink4URL=http://industrial.panasonic.com/www-data/pdf/AOA0000/AOA0000CE2.pdf?src-supplier=Avnet+Europe, ComponentLink5Description=http://industrial.panasonic.com/www-data/pdf/AOA0000/AOA0000CE2.pdf?src-supplier=Avnet, ComponentLink5URL=http://industrial.panasonic.com/www-data/pdf/AOA0000/AOA0000CE2.pdf?src-supplier=Avnet, ComponentLink6Description=https://industrial.panasonic.com/cdbs/www-data/pdf/RDA0000/DMA0000COL11.pdf?src-supplier=Mouser, ComponentLink6URL=https://industrial.panasonic.com/cdbs/www-data/pdf/RDA0000/DMA0000COL11.pdf?src-supplier=Mouser, ComponentLink7Description=https://industrial.panasonic.com/cdbs/www-data/pdf/RDA0000/DMA0000COL11.pdf?src-supplier=Allied+Electronics, ComponentLink7URL=https://industrial.panasonic.com/cdbs/www-data/pdf/RDA0000/DMA0000COL11.pdf?src-supplier=Allied+Electronics, Composition="Thick Film", Contact Plating=Tin, Depth=0.8mm, Features="Automotive AEC-Q200", Height=0.45mm, Lead Free="Lead Free", Length=1.6mm, Manufacturer Part Number=ERJ3EKF1002V, Military Standard=Not, Mount="Surface Mount", Number of Pins=2, Number of Terminations=2, Packaging="Tape and Reel", Power Rating=100mW, Radiation Hardening=No, REACH SVHC="No SVHC", Resistance=10K, Stock 1=0, Supplier 1=Farnell, Termination=SMD/SMT, Voltage Rating (DC)=75V, Width=0.031inch
R4: library part ERJ3EKF1001V, "RESISTOR 0603 1K 1%", Case/Package=0603, Case Code (Metric)=1608, Manufacturer=Panasonic, Max Operating Temperature=155°C, Max Power Dissipation=100mW, Min Operating Temperature=-55°C, Package Quantity=5000, Temperature Coefficient=100ppm/°C, Tolerance=1%, Voltage Rating=75V, Case Code (Imperial)=0603, ComponentLink1Description=http://www.farnell.com/datasheets/1911175.pdf?src-supplier=Allied+Electronics, ComponentLink1URL=http://www.farnell.com/datasheets/1911175.pdf?src-supplier=Allied+Electronics, ComponentLink2Description=http://industrial.panasonic.com/www-data/pdf/AOA0000/AOA0000CE2.pdf?src-supplier=Future+Electronics, ComponentLink2URL=http://industrial.panasonic.com/www-data/pdf/AOA0000/AOA0000CE2.pdf?src-supplier=Future+Electronics, ComponentLink3Description=http://industrial.panasonic.com/www-data/pdf/AOA0000/AOA0000CE2.pdf?src-supplier=Element14, ComponentLink3URL=http://industrial.panasonic.com/www-data/pdf/AOA0000/AOA0000CE2.pdf?src-supplier=Element14, ComponentLink4Description=http://industrial.panasonic.com/www-data/pdf/AOA0000/AOA0000CE2.pdf?src-supplier=Avnet, ComponentLink4URL=http://industrial.panasonic.com/www-data/pdf/AOA0000/AOA0000CE2.pdf?src-supplier=Avnet, ComponentLink5Description=http://industrial.panasonic.com/cdbs/www-data/pdf/RDA0000/AOA0000C304.pdf?src-supplier=Element14, ComponentLink5URL=http://industrial.panasonic.com/cdbs/www-data/pdf/RDA0000/AOA0000C304.pdf?src-supplier=Element14, ComponentLink6Description=http://www.mouser.com/ds/2/315/AOA0000CE2-37512.pdf?src-supplier=Mouser, ComponentLink6URL=http://www.mouser.com/ds/2/315/AOA0000CE2-37512.pdf?src-supplier=Mouser, ComponentLink7Description=http://www.farnell.com/datasheets/1678782.pdf?src-supplier=Element14, ComponentLink7URL=http://www.farnell.com/datasheets/1678782.pdf?src-supplier=Element14, ComponentLink8Description=http://industrial.panasonic.com/www-data/pdf/AOA0000/AOA0000CE2.pdf?src-supplier=Avnet+Europe, ComponentLink8URL=http://industrial.panasonic.com/www-data/pdf/AOA0000/AOA0000CE2.pdf?src-supplier=Avnet+Europe, Composition="Thick Film", Contact Plating=Tin, Depth=0.8mm, Features="Automotive AEC-Q200", Height=0.45mm, Lead Free="Lead Free", Length=1.6mm, Manufacturer Part Number=ERJ3EKF1001V, Military Standard=Not, Mount="Surface Mount", Number of Pins=2, Number of Terminations=2, Packaging="Tape and Reel", Power Rating=100mW, Radiation Hardening=No, REACH SVHC="No SVHC", Resistance=1K, Stock 1=0, Supplier 1=Farnell, Termination=SMD/SMT, Voltage Rating (DC)=75V, Width=0.8mm
R7 R9: library part ERJ3EKF84R5V, "RESISTOR 0603 84R5 1%", Case/Package=0603, Case Code (Metric)=1608, Manufacturer=Panasonic, Manufacturer Part Number=ERJ-3EKF84R5V, Max Operating Temperature=155°C, Max Power Dissipation=100mW, Min Operating Temperature=-55°C, Package Quantity=1, Resistor Type="Thick Film", Temperature Coefficient=100ppm/°C, Tolerance=1%, Voltage Rating=75V, Voltage Rating (DC)=50V, Case Code (Imperial)=0603, ComponentLink1Description=http://www.farnell.com/datasheets/1678782.pdf?src-supplier=Farnell, ComponentLink1URL=http://www.farnell.com/datasheets/1678782.pdf?src-supplier=Farnell, ComponentLink2Description=http://www.farnell.com/datasheets/1678782.pdf?src-supplier=Element14, ComponentLink2URL=http://www.farnell.com/datasheets/1678782.pdf?src-supplier=Element14, ComponentLink3Description=http://www.mouser.com/ds/2/315/AOA0000C283-1093288.pdf?src-supplier=Mouser, ComponentLink3URL=http://www.mouser.com/ds/2/315/AOA0000C283-1093288.pdf?src-supplier=Mouser, ComponentLink4Description=http://industrial.panasonic.com/www-data/pdf/AOA0000/AOA0000CE2.pdf?src-supplier=Avnet, ComponentLink4URL=http://industrial.panasonic.com/www-data/pdf/AOA0000/AOA0000CE2.pdf?src-supplier=Avnet, Contact Plating=Tin, Depth=0.8mm, Features="Automotive AEC-Q200", Height=0.022inch, Lead Free="Lead Free", Length=1.6mm, Military Standard=Not, Mount="Surface Mount", Number of Terminations=2, Packaging="Tape and Reel", Power Rating=100mW, REACH SVHC="No SVHC", Resistance=84.5R, Stock 1=0, Supplier 1=Farnell, Width=0.031inch
R8 R10: library part ERJ3EKF1580V, "RESISTOR 0603 158R 1%", Case/Package=0603, Case Code (Metric)=1608, Manufacturer=Panasonic, Manufacturer Part Number=ERJ-3EKF1580V, Max Operating Temperature=155°C, Max Power Dissipation=100mW, Min Operating Temperature=-55°C, Package Quantity=1, Resistor Type="Thick Film", Temperature Coefficient=100ppm/°C, Tolerance=1%, Voltage Rating=75V, Voltage Rating (DC)=50V, Case Code (Imperial)=0603, ComponentLink1Description=http://www.farnell.com/datasheets/1678782.pdf?src-supplier=Element14, ComponentLink1URL=http://www.farnell.com/datasheets/1678782.pdf?src-supplier=Element14, ComponentLink2Description=http://industrial.panasonic.com/www-data/pdf/AOA0000/AOA0000CE2.pdf?src-supplier=Avnet, ComponentLink2URL=http://industrial.panasonic.com/www-data/pdf/AOA0000/AOA0000CE2.pdf?src-supplier=Avnet, ComponentLink3Description=http://www.farnell.com/datasheets/1678782.pdf?src-supplier=Farnell, ComponentLink3URL=http://www.farnell.com/datasheets/1678782.pdf?src-supplier=Farnell, ComponentLink4Description=http://www.mouser.com/ds/2/315/AOA0000C283-1093288.pdf?src-supplier=Mouser, ComponentLink4URL=http://www.mouser.com/ds/2/315/AOA0000C283-1093288.pdf?src-supplier=Mouser, Contact Plating=Tin, Depth=0.8mm, Features="Automotive AEC-Q200", Height=0.022inch, Lead Free="Lead Free", Length=1.6mm, Military Standard=Not, Mount="Surface Mount", Number of Terminations=2, Packaging="Tape and Reel", Power Rating=100mW, REACH SVHC=Yes, Resistance=158R, Stock 1=0, Supplier 1=Farnell, Width=0.031inch
U1: "2-CHAN VGA 32LFCSP", Case/Package="LFCSP EP", Input Offset Voltage (Vos)=50mV, Input Resistance=6kR, Manufacturer="Analog Devices", Max Operating Temperature=85°C, Max Supply Voltage=5.5V, Min Operating Temperature=-40°C, Min Supply Voltage=4.5V, Operating Supply Current=58mA, Operating Supply Voltage=5V, Package Quantity=1, Power Dissipation=1.97W, Power Supply Rejection Ratio (PSRR)=68dB, Voltage Gain=19dB, -3db Bandwidth=120MHz, Bandwidth=100MHz, ComponentLink1Description=http://www.mouser.com/ds/2/609/AD8331_8332_8334-877850.pdf?src-supplier=Mouser, ComponentLink1URL=http://www.mouser.com/ds/2/609/AD8331_8332_8334-877850.pdf?src-supplier=Mouser, ComponentLink2Description=http://www.analog.com/media/en/technical-documentation/data-sheets/AD8331_8332_8334.pdf?src-supplier=Digi-Key, ComponentLink2URL=http://www.analog.com/media/en/technical-documentation/data-sheets/AD8331_8332_8334.pdf?src-supplier=Digi-Key, ComponentLink3Description=http://www.analog.com/static/imported-files/data_sheets/AD8331_8332_8334.pdf?src-supplier=Avnet+Europe, ComponentLink3URL=http://www.analog.com/static/imported-files/data_sheets/AD8331_8332_8334.pdf?src-supplier=Avnet+Europe, ComponentLink4Description=http://www.analog.com/static/imported-files/data_sheets/AD8331_8332_8334.pdf?src-supplier=Avnet, ComponentLink4URL=http://www.analog.com/static/imported-files/data_sheets/AD8331_8332_8334.pdf?src-supplier=Avnet, Contact Plating=Tin,Matte, Gain=55dB, Gain Bandwidth Product=120MHz, Height=0.8mm, Lead Free="Contains Lead", Length=5mm, Manufacturer Part Number=AD8332ACPZ-R7, Mount="Surface Mount", Noise Figure=4.2dB, Number of Amplifiers=2, Number of Channels=2, Number of Elements=2, Number of Pins=32, Packaging="Tape and Reel", Radiation Hardening=No, REACH SVHC="No SVHC", Slew Rate=650V/µs, Stock 1=0, Supplier 1=Farnell, Width=5mm

## Via types
v1: diameter 0.45, hole 0.2, Component Side to Solder Side, 184 vias

## Nets (pads, with @x,y where several pads share a name; then routed paths per layer and width w, separated by ;. In a path a pad name is that pad's centre, name@x,y a point inside that pad or via, vN(x,y) a via of type N, cw(c..) or ccw(c..) an arc to the next point about the centre after c; other vN are vias at no path point)
+5LNA: C6.1 C7.2 FB2.2 R1.2 U1.2 | length 29.7
  Component Side w0.2: v1(102.55,67.25) R1.2 ; v1(102.775,79.125) C6.1 C7.2 103.905,75.245 U1.2
  Component Side w0.45: FB2.2 v1(99.15,63.875)
  Signal Layer 2 w0.45: v1(99.15,63.875) 99.15,65.4 99.95,66.2 101.5,66.2 v1(102.55,67.25) 104.475,69.175 105.525,69.175 106.075,69.725 106.075,75.025 105.775,75.325 103.95,75.325 102.775,76.5 v1(102.775,79.125)
+5V: C19.1 FB2.1 FB3.1 J4.1
+5VGA: C23.2 C24.2 FB3.2 U1.21 U1.25 U1.26 | length 32.8
  Component Side w0.2: U1.26 U1.25 109.788,76.388 v1(110.25,76.85) C23.2 111.225,76.2 111.9,75.525 111.9,74.55 111.6,74.25 109.717,74.25 U1.21 ; v1(110.25,81.25) C24.2
  Component Side w0.45: FB3.2 v1(102.505,63.87)
  Signal Layer 2 w0.45: v1(102.505,63.87) 103.845,63.87 105.2,65.225 105.2,67.6 107.175,69.575 107.175,72.35 108.475,73.65 108.475,75.65 109.675,76.85 ; v1(110.25,76.85) 109.675,76.85 ; v1(110.25,81.25) 109.475,81.25 109.275,81.05 109.275,77.25 109.675,76.85
ADC+: ADC+.1 C21.2 R8.2 | length 15.4
  Component Side w0.254: R8.2 C21.2 123.775,65 ADC+.1
ADC-: ADC-.1 C21.1 R10.2 | length 15.4
  Component Side w0.254: R10.2 C21.1 123.775,81 ADC-.1
GAIN: C16.2 J4.5 U1.15 | length 18.8
  Component Side w0.2: U1.15 108.57,71.055 v1(108.925,70.7) ; v1(110.725,70.7) 111,70.425 C16.2 111.55,69.15 111.9,68.8 111.9,63.625 113.45,62.075 113.45,57.31 J4.5
  Solder Side w0.2: v1(108.925,70.7) v1(110.725,70.7)
GND: ADC+.2 ADC-.2 C1.1 C2.1 C4.1 C6.2 C7.1 C8.2 C9.1 C10.1 C11.2 C12.1 C13.1 C16.1 C19.2 C23.1 C24.1 D1.1 D1.2 INPUT.2 J4.6 Pf1.1 Pf3.1 R4.1 R5.1 R6.1 U1.10 U1.17 U1.24 U1.31 U1.33 | length 27.8
  Component Side w0.2: v1(104.5,71.25) 104.85,70.9 105.9,70.9 106.08,71.08 U1.10 ; U1.33@106.08,72.755 v1(107.325,74) U1.33@106.08,75.245 ; v1(106.95,64.6) C13.1 107.625,64.55 C13.1@107.575,64.6 ; v1(106.95,66.225) C12.1 ; U1.24 v1(110.6,75.753)
  Component Side w0.3: v1(99.15,56.7) C19.2 C19.2@99.26,55.89 ; U1.10 U1.33@106.08,72.755 ; U1.33@106.08,75.245 U1.31 ; U1.17 v1(110.5,72.247)
  Component Side w0.45: D1.1 v1(85.3,70.65) D1.2 ; v1(89.922,69.25) Pf1.1 ; Pf3.1 92.822,69.253 v1(92.825,69.25) ; v1(99.375,72.575) C4.1 ; v1(100.575,76.375) C7.1 ; v1(100.575,78.125) C6.2 ; v1(101.125,70.55) C1.1 C2.1 ; v1(104.172,63.025) R4.1 ; v1(107.05,61.425) R6.1 ; C11.2 v1(109.125,68.688) C10.1 ; C9.1 v1(110.1,78.5) ; C8.2 v1(110.1,80.125) ; v1(111,66.95) C16.1 ; C23.1 C24.1 ; R5.1 v1(112.675,61.425)
  other v1: 125.25,59.742 126.125,59.742 127,59.742 127.875,59.742 128.75,59.742 125.25,61.492 126.125,61.492 127,61.492 127.875,61.492 128.75,61.492 123.875,64.4 123.15,64.9 122.525,65.525 123.875,65.625 121.9,66.15 123.25,66.25 121.275,66.775 122.625,66.875 120.65,67.4 122,67.5 76.25,67.742 77.125,67.742 78,67.742 78.875,67.742 79.75,67.742 120.025,68.025 121.375,68.125 125.25,68.508 126.125,68.508 127,68.508 127.875,68.508 128.75,68.508 119.4,68.65 120.75,68.75 118.775,69.275 120.125,69.375 76.25,69.493 77.125,69.493 78,69.493 78.875,69.493 79.75,69.493 118.15,69.9 119.5,70 125.25,70.258 126.125,70.258 127,70.258 127.875,70.258 128.75,70.258 117.525,70.525 118.875,70.625 116.9,71.15 118.25,71.25 115.5,71.65 117.625,71.875 111.25,72.247 112,72.25 81.125,72.5 81.975,72.5 82.875,72.5 83.75,72.5 84.625,72.5 86,72.5 86.875,72.5 87.75,72.5 88.625,72.5 115.5,73 117.625,73 81.125,73.5 82,73.5 82.875,73.5 83.75,73.5 84.625,73.5 86,73.5 86.875,73.5 87.75,73.5 88.625,73.5 110.5,73.746 112,73.746 111.25,73.75 117.625,74.125 100.5,74.3 101.375,74.3 102.25,74.3 103.125,74.3 115.5,74.35 93.75,74.425 94.625,74.425 118.25,74.775 116.9,74.85 102.25,75.245 100.5,75.25 101.375,75.25 103.125,75.25 118.875,75.375 93.75,75.425 94.625,75.425 117.525,75.5 125.25,75.742 126.125,75.742 127,75.742 127.875,75.742 128.75,75.742 119.5,76 118.15,76.1 76.25,76.508 77.125,76.508 78,76.508 78.875,76.508 79.75,76.508 120.125,76.617 118.775,76.725 120.75,77.25 119.4,77.342 125.25,77.492 126.125,77.492 127,77.492 127.875,77.492 128.75,77.492 121.375,77.9 120.025,77.975 76.25,78.258 77.125,78.258 78,78.258 78.875,78.258 79.75,78.258 122,78.525 120.65,78.625 111.225,79.05 122.625,79.125 121.275,79.25 123.25,79.75 121.9,79.85 123.875,80.375 122.525,80.475 123.15,81.1 123.875,81.6 125.25,84.508 126.125,84.508 127,84.508 127.875,84.508 128.75,84.508 125.25,86.258 126.125,86.258 127,86.258 127.875,86.258 128.75,86.258
HILO: J4.4 R5.2 U1.27 | length 30.6
  Component Side w0.2: U1.27 108.087,77.087 v1(108.325,77.325) ; J4.4 110.125,57.425 110.55,57.85 R5.2 v1(110.55,65.625)
  Solder Side w0.2: v1(108.325,77.325) 111.525,77.325 111.9,76.95 111.9,74.55 111.6,74.25 108.7,74.25 108.225,73.775 108.225,66.125 108.725,65.625 v1(110.55,65.625)
INPUT: D1.3 INPUT.1 Pf1.2 Pf2.1 | length 13.8
  Component Side w0.254: INPUT.1 89.847,73 89.922,73.075 Pf2.1
MODE: J4.3 R6.2 U1.14 | length 16.5
  Component Side w0.2: J4.3 107.585,58.935 109.175,60.525 R6.2 108.7,61.425 108.4,61.725 108.4,70.55 108.087,70.863 U1.14
NetC1_2: C1.2 U1.4 | length 4.8
  Component Side w0.2: C1.2 101.125,73.35 101.375,73.6 103.65,73.6 104.304,74.254 U1.4
NetC2_2: C2.2 U1.5 | length 2.5
  Component Side w0.2: C2.2 103.375,72.75 104.371,73.746 U1.5
NetC3_1: C3.1 FB1.2 | length 1.8
  Component Side w0.254: FB1.2 C3.1
NetC3_2: C3.2 C4.2 C5.2 U1.3 | length 8.7
  Component Side w0.2: C4.2 U1.3@104.924,74.775
  Component Side w0.254: C3.2 C4.2 C5.2 ; U1.3@104.924,74.775 U1.3
NetC5_1: C5.1 R2.2 | length 4.2
  Component Side w0.2: C5.1 99.375,79.925 99.65,80.2 R2.2
NetC12_2: C12.2 C13.2 R3.1 U1.16 | length 10.1
  Component Side w0.2: U1.16 109.638,71.612 110,71.25 110,66.375 109.85,66.225 C12.2 109.15,66.2 R3.1
NetC14_1: C14.1 U1.29 | length 2.4
  Component Side w0.2: C14.1 106.296,77.879 107.071,77.104 U1.29
NetC14_2: C14.2 R2.1 U1.1 | length 11.2
  Component Side w0.2: R2.1 102.8,80.775 103.025,81 v1(104,81) 105.95,81 106.3,80.65 106.296,80.646 C14.2 ; v1(104,76.25) 104,75.925 104.172,75.753 U1.1
  Solder Side w0.2: v1(104,76.25) v1(104,81)
NetC15_1: C15.1 U1.30 | length 3.5
  Component Side w0.2: C15.1 104.65,77.825 105,77.475 106.075,77.475 106.55,77 106.55,76.401 U1.30
NetC15_2: C15.2 U1.32 | length 5.9
  Component Side w0.2: C15.2 103.975,79.875 103.725,79.625 103.725,77.325 103.95,77.1 105.35,77.1 105.56,76.89 105.56,76.375 U1.32
NetC17_1: C17.1 U1.12 | length 2.8
  Component Side w0.2: C17.1 105.763,69.55 107.071,70.858 U1.12
NetC17_2: C17.2 U1.23 | length 15.4
  Component Side w0.2: v1(106,67.25) C17.2 ; U1.23 v1(111.25,75.245)
  Solder Side w0.2: v1(106,67.25) 106,74.845 106.4,75.245 v1(111.25,75.245)
NetC18_1: C18.1 U1.11 | length 3.9
  Component Side w0.2: C18.1 104.25,70.2 104.525,70.475 106.1,70.475 106.563,70.938 U1.11
NetC18_2: C18.2 U1.22 | length 16.4
  Component Side w0.2: v1(104.25,67.25) C18.2 ; U1.22 v1(110.6,74.762)
  Solder Side w0.2: v1(104.25,67.25) 104.25,66.825 104.475,66.6 106.3,66.6 106.55,66.85 106.55,74.35 106.962,74.762 v1(110.6,74.762)
NetC20_1: C20.1 R7.2 | length 1.6
  Component Side w0.254: C20.1 R7.2
NetC20_2: C20.2 L1.1 | length 1.8
  Component Side w0.254: C20.2 112.875,67.75 L1.1
NetC22_1: C22.1 R9.2 | length 1.6
  Component Side w0.254: R9.2 C22.1
NetC22_2: C22.2 L2.1 | length 1.8
  Component Side w0.254: C22.2 112.875,78.25 L2.1
NetFB1_1: FB1.1 Pf2.2 Pf3.2 | length 5.1
  Component Side w0.254: Pf3.2 Pf2.2 FB1.1
NetL1_2: L1.2 R8.1 | length 1.7
  Component Side w0.254: L1.2 R8.1
NetL2_2: L2.2 R10.1 | length 1.7
  Component Side w0.254: R10.1 L2.2
NetR1_1: R1.1 U1.7 | length 5.1
  Component Side w0.2: R1.1 102.55,70.1 102.825,70.375 103.575,70.375 103.9,70.7 103.9,72.475 104.18,72.755 U1.7
NetR3_2: R3.2 R4.2 | length 1.3
  Component Side w0.2: R4.2 R3.2
NetR7_1: R7.1 U1.18 | length 3.3
  Component Side w0.2: U1.18 112.345,72.755 R7.1
NetR9_1: R9.1 U1.19 | length 3.3
  Component Side w0.2: U1.19 112.338,73.238 R9.1
V_ADC: C8.1 C9.2 C10.2 C11.1 J4.2 U1.13 U1.28 | length 50.1
  Component Side w0.2: J4.2 105.045,61.425 105.55,61.93 105.55,65.85 106.9,67.2 107.325,67.2 107.675,67.55 C11.1 107.7,67.9 107.7,70.5 107.579,70.621 U1.13 ; U1.28 107.6,76.409 107.6,77.425 107.9,77.725 C9.2 C8.1 v1(107.9,81.25)
  Solder Side w0.2: J4.2 105.045,65.355 103.7,66.7 103.7,75.025 104.45,75.775 106.725,75.775 107.075,76.125 107.075,80.95 107.375,81.25 v1(107.9,81.25)
pads on no net: U1.6 U1.8 U1.9 U1.20

## Polygon pours and split planes (outlines as drawn)
GND on Signal Layer 1 "Signal_1_GND" (solid, pour order 0): 75,54 130,54 130,92 75,92
GND on Signal Layer 2 "Signal_2_GND" (solid, pour order 1): 75,54 130,54 130,92 75,92

## Other copper
Component Side:
  rectangle net +5V: 101.75,55.775 103.25,58.375
  rectangle net +5V: 98.225,58.3 103.25,61.525

## Silkscreen, mask and mechanical layers (free items; w line width, h text height)
Top Overlay:
  text "AD8332 Test Board" at 79.225,87.85 h1.52
  text "O" at 80.575,54.05 h15
Mechanical 7:
  the board outline again, w0.1